# Altium PCB PCM2706 Bus Powered USB DAC 4.PcbDoc
Units mil, origin at the board's own origin, x right, y up, seen from the top; angles counter-clockwise.
Board outline 6000 x 4000 mil, 2 copper layers (Top Layer, Bottom Layer); 29 components, 21 nets, 99 pads, 0 vias.
Unrouted connection lines stored in the file: 2.
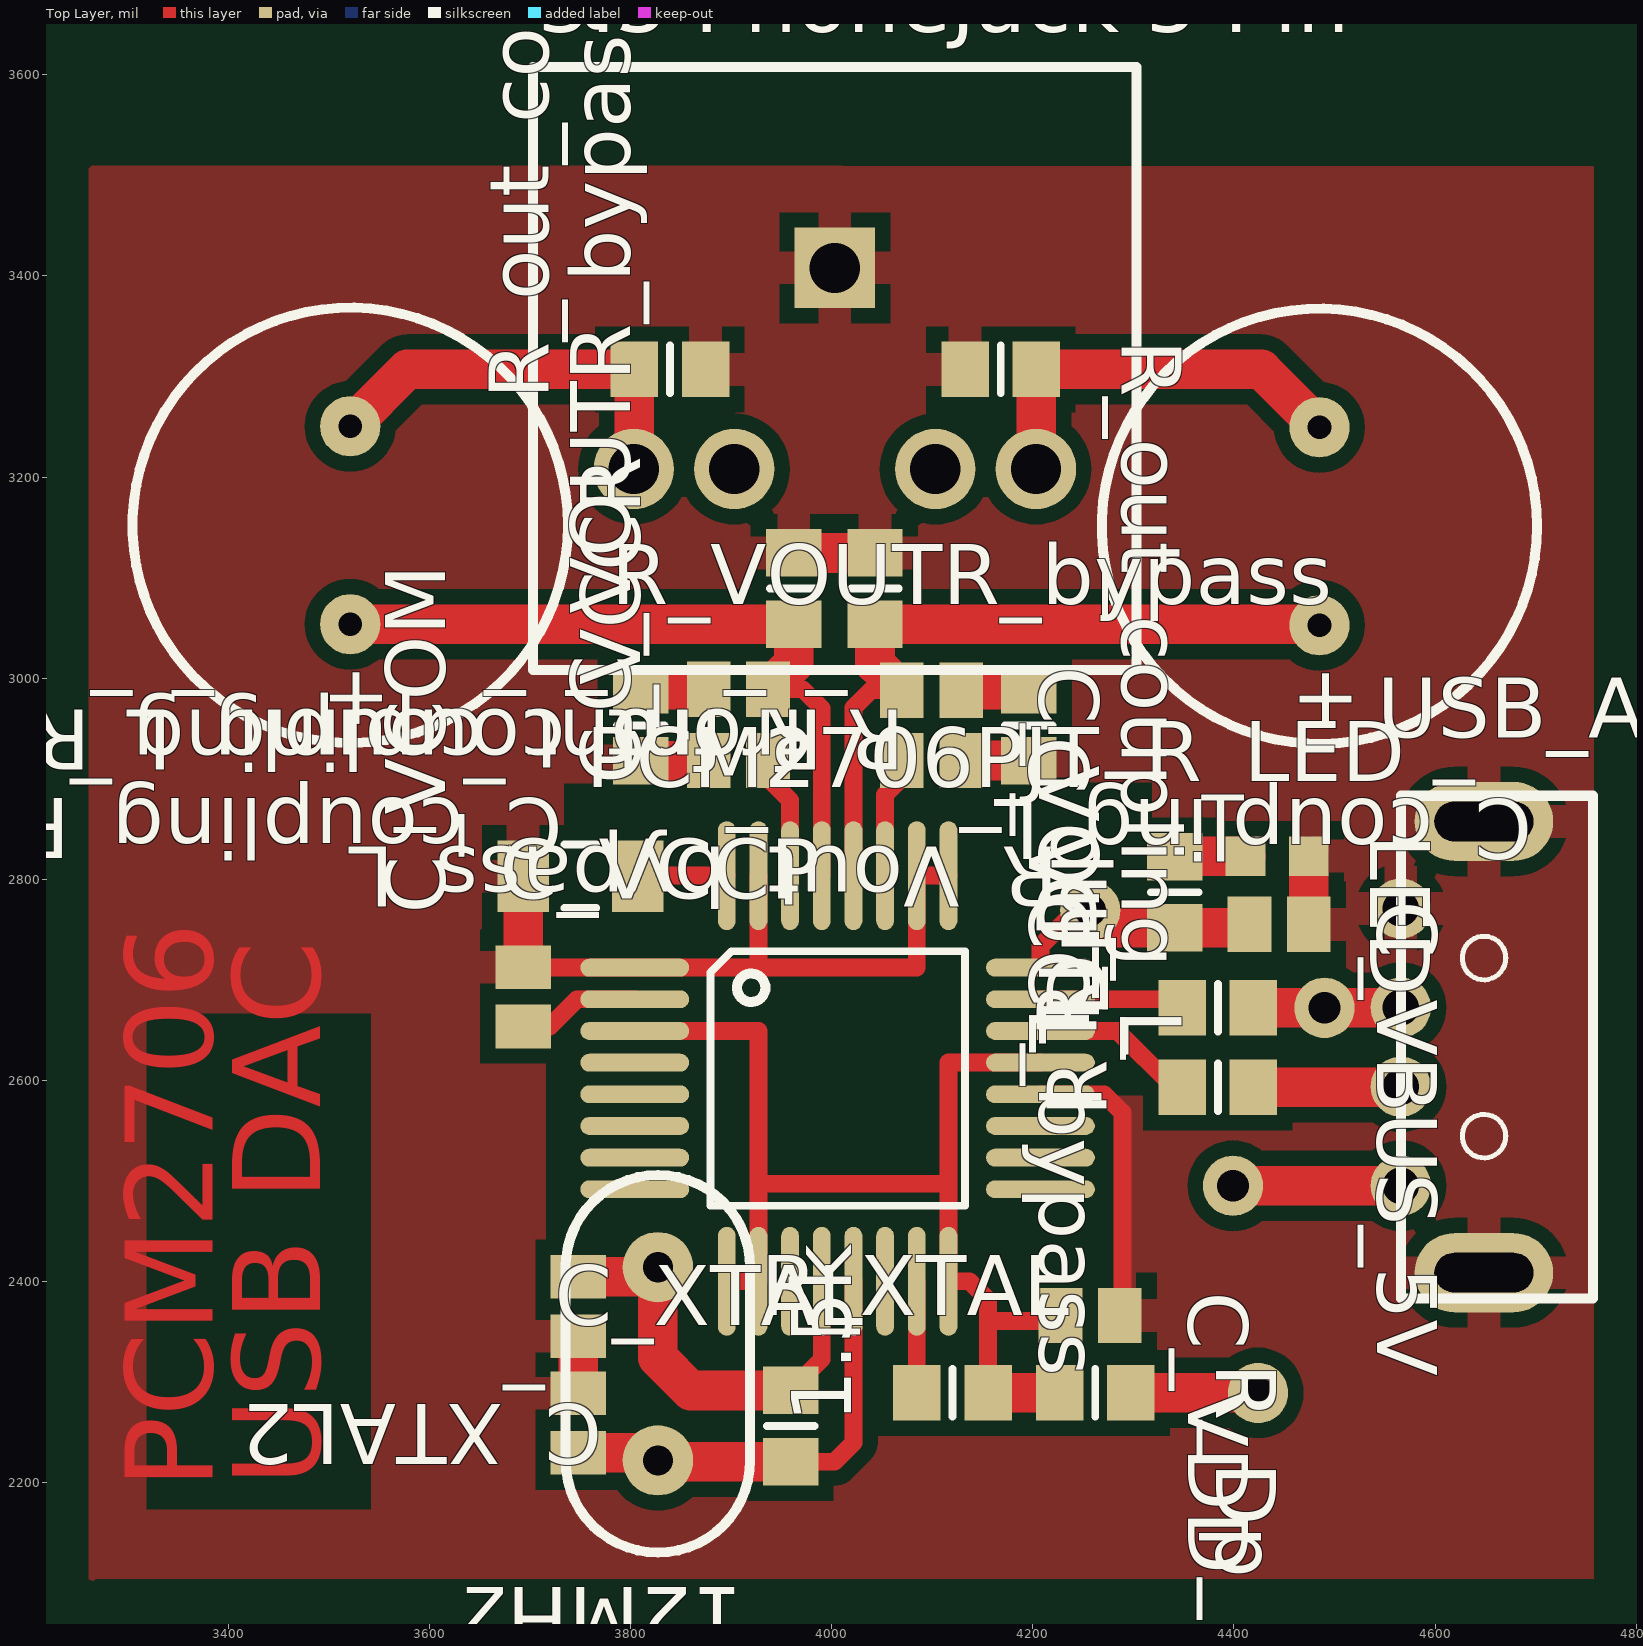
[diagram p0: Top Layer view]
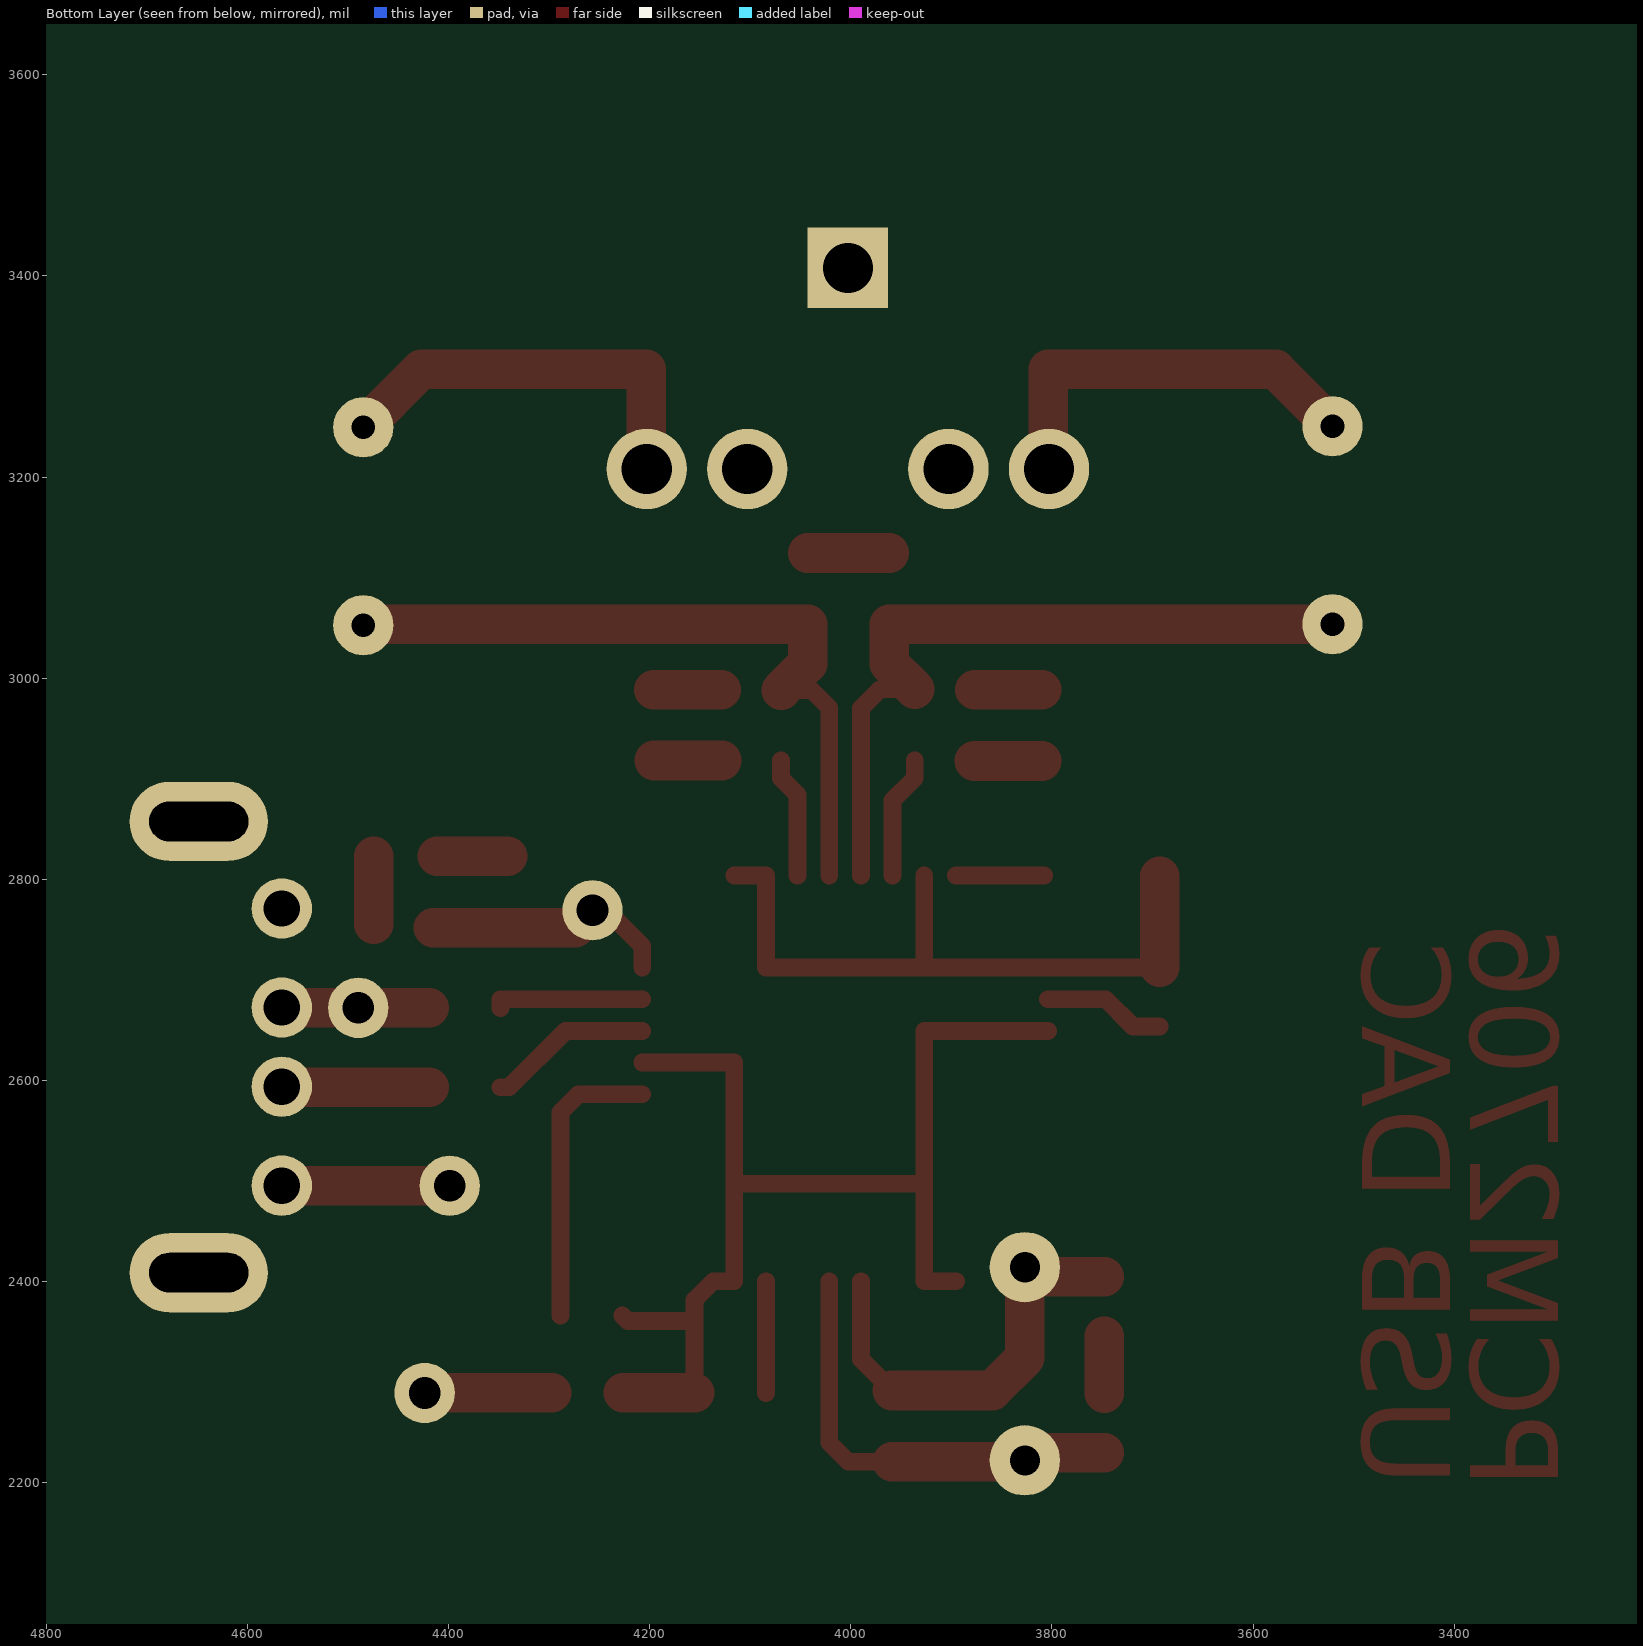
[diagram p1: Bottom Layer view, seen from below]

## Layer stack, top to bottom
Top Layer: signal copper 1.4
Dielectric: dielectric 12.6, FR-4, Dk 4.8
Bottom Layer: signal copper 1.4

## Board outline
1000,1000 7000,1000 7000,5000 1000,5000

## Design rules (kind name [scope] priority, off if disabled: settings)
Clearance [All] p1: gap=15
PolygonConnect [All] p1: connectstyle=Relief reliefconductorwidth=33 reliefentries=4 polygonreliefangle="90 Angle"
RoutingVias [All] p1: holewidth=28 width=50 viastyle="Through Hole" minholewidth=28 minwidth=50 maxholewidth=28 maxwidth=50
SilkscreenOverComponentPads [All] p1: minsilkscreentomaskgap=10
SolderMaskExpansion [All] p1: expansion=4
Width [All] p1: maxlimit=10 minlimit=10 preferedwidth=10
27 further rules are at their usual default settings.

## Components (designator, comment, footprint, x,y, rotation, side; value= is the part's Value field where it differs from the comment)
1.5k "R_DT_pullup" 6-0805_N 4120,2289 r180 top
"3.5 PhoneJack 5 Pin" "3.5 PhoneJack 5 Pin" "3.5 PhoneJack 5 Pin" 4003,3408 r90 top
12MHz "XTAL" "12MHz Crystal OSC through hole" 3827,2318 r270 top
C_coupling_L "Cap Pol1" CAP_270uf_16V_solid_Aluminum 4485,3151 r270 top
C_coupling_R "Cap Pol1" CAP_270uf_16V_solid_Aluminum 3521,3152 r270 top
C_VBUS_5V "" C0805 4445,2755 r0 top
C_VCCL "" C0805 4099,2918 r0 top
C_VCCP "" C0805 3693,2683 r90 top
C_VCCR "" C0805 3907,2918 r180 top
C_VCOM "" CAPC3216N 3750,2803 r180 top
C_VDD "" C0805 4257,2366 r0 top
C_VOUTL_bypass "" C0805 4099,2988 r0 top
C_VOUTR_bypass "" C0805 3907,2989 r180 top
C_XTAL "" C0805 3748,2259 r90 top
C_XTAL2 "" C0805 3748,2375 r270 top
LED "" CAPC1608N 4443,2823 r0 top
PCM2706PJT "PCM2706PJT" S-PQFP-N32-2mm-out 3804,2712 r0 top
R_Dm "22" 6-0805_N 4384,2593 r180 top
R_Dp "22" 6-0805_N 4384,2672 r180 top
R_Dp_pullup "1.5k" 6-0805_N 4262,2289 r0 top
R_front_coupling_L "3.3k" 6-0805_N 4043,3089 r270 top
R_front_coupling_R "3.3k" 6-0805_N 3962,3089 r270 top
R_LED "330" 6-0805_N 4341,2787 r90 top
R_out_coupling_L "3.3k" 6-0805_N 4168,3307 r0 top
R_out_coupling_R "3.3k" 6-0805_N 3839,3307 r180 top
R_Vout_bypass_L "16" 6-0805_N 4196,2953 r270 top
R_VOUTR_bypass "16" 6-0805_N 3810,2953 r90 top
R_XTAL "1M" 6-0805_N 3959,2256 r90 top
USB_A_male_thruhole "USB_A_male_thruhole" USB_A_male_thruhole 4566,2633 r90 top

## Footprints (in the part's own frame and the unit in brackets; to place one, negate y for a bottom-side part, rotate by r counter-clockwise, add the part's x,y. Pads: shape width x height; smd on the part's side, far side on the other; paste and mask are expansions set on the pad)
"3.5 PhoneJack 5 Pin" [mil] "3.5 PhoneJack 5 Pin"
  rect 80x80 hole 50: COM(0,0)
  round 80 hole 50: L_NC(-200,-100) L_NO(-200,-200) R_NC(-200,100) R_NO(-200,200)
  silkscreen extent -400,-300 200,300
6-0805_N [mm] "Chip Resistor, Body 2.0x1.2mm, IPC Medium Density"
  rect 1.2x1.4 smd: 1(-0.9,0) 2(0.9,0)
  silkscreen extent 0,-0.6 0,0.6, body extent -1.07,-0.7 1.07,0.7, height 0.7
"12MHz Crystal OSC through hole" [mil]
  round 70 hole 30: 1(-96.06,0) 2(96.06,0)
  silkscreen extent -188,-92 188,92
C0805 [mm] "Chip Capacitor, Body 2.0x1.3mm, IPC High Density"
  rect 1.1x1.4 smd: 1(-0.75,0) 2(0.75,0)
  body extent -1.1,-0.72 1.1,0.72, height 1.4
CAP_270uf_16V_solid_Aluminum [mil]
  round 60 hole 23.62: 1(98.43,0) 2(-98.43,0)
  silkscreen extent -216,-216 216,217
CAPC1608N [mm] "Chip Capacitor, Body 1.6x0.8mm, IPC Medium Density"
  rect 1x1 smd: 1(-0.8,0) 2(0.8,0)
  body extent -0.87,-0.48 0.87,0.48, height 0.85
CAPC3216N [mm] "Chip Capacitor, Body 3.2x1.6mm, IPC Medium Density"
  rect 1.3x1.8 smd: 1(-1.45,0) 2(1.45,0)
  silkscreen extent -0.4,-0.8 0.4,0.8, body extent -1.7,-0.9 1.7,0.9, height 1.35
S-PQFP-N32-2mm-out [mm]
  oval 2.75x0.45 smd: 1(0,0) 2(0,-0.8) 3(0,-1.6) 4(0,-2.4) 5(0,-3.2) 6(0,-4) 7(0,-4.8) 8(0,-5.6) 17(10.25,-5.6) 18(10.25,-4.8) 19(10.25,-4) 20(10.25,-3.2) 21(10.25,-2.4) 22(10.25,-1.6) 23(10.25,-0.8) 24(10.25,0)
  oval 0.45x2.75 smd: 9(2.325,-7.925) 10(3.125,-7.925) 11(3.925,-7.925) 12(4.725,-7.925) 13(5.525,-7.925) 14(6.325,-7.925) 15(7.125,-7.925) 16(7.925,-7.925) 25(7.925,2.325) 26(7.125,2.325) 27(6.325,2.325) 28(5.525,2.325) 29(4.725,2.325) 30(3.925,2.325) 31(3.125,2.325) 32(2.325,2.325)
  silkscreen extent 1.91,-6.02 8.34,0.42
USB_A_male_thruhole [mm]
  oval 2x3.5 hole 1 slot 2.5 at 90 deg: com(-5.7,-2.1) com(5.7,-2.1)
  round 1.524 hole 0.92: D+(1,0) D-(-1,0) Gnd(3.5,0) Vbus(-3.5,0)
  silkscreen extent -6.35,-4.85 6.35,0

## Part data
1.5k R_Dm R_Dp R_Dp_pullup R_front_coupling_L R_front_coupling_R R_LED R_out_coupling_L R_out_coupling_R R_Vout_bypass_L R_VOUTR_bypass R_XTAL: library part "Res Thermal", "Thermistor"
12MHz: "Crystal Oscillator"
C_coupling_L C_coupling_R: "Polarized Capacitor (Radial)"
C_VBUS_5V C_VCCL C_VCCP C_VCCR C_VCOM C_VDD C_VOUTL_bypass C_VOUTR_bypass C_XTAL C_XTAL2: library part "Cap Pol3", "Polarized Capacitor (Surface Mount)"
LED: library part LED2, "Typical RED, GREEN, YELLOW, AMBER GaAs LED"

## Free pads (board coordinates)
  round 60 hole 31.5: Jump_D+_1(4490,2672) Jump_D+_2(4424,2289) Jump_Vbus_1(4399,2495) Jump_Vbus_2(4257,2769)

## Nets (pads, with @x,y where several pads share a name; then routed paths per layer and width w, separated by ;. In a path a pad name is that pad's centre, name@x,y a point inside that pad or via, vN(x,y) a via of type N, cw(c..) or ccw(c..) an arc to the next point about the centre after c; other vN are vias at no path point)
GND: "3.5 PhoneJack 5 Pin.COM" C_VBUS_5V.2 C_VCCL.2 C_VCCP.2 C_VCCR.2 C_VCOM.2 C_VDD.2 C_XTAL2.2 C_XTAL.2 LED.2 PCM2706PJT.1 PCM2706PJT.20 PCM2706PJT.25 PCM2706PJT.26 PCM2706PJT.31 R_front_coupling_L.1 R_front_coupling_R.1 R_out_coupling_L.1 R_out_coupling_R.1 R_Vout_bypass_L.2 R_VOUTR_bypass.1 USB_A_male_thruhole.com USB_A_male_thruhole.Gnd | length 1326.8
  Top Layer w17.72: C_VCCP.2@3693.53,2712 PCM2706PJT.1 3927.03,2712 ; PCM2706PJT.31 3927.03,2712 ; PCM2706PJT.25 PCM2706PJT.26 4084.51,2712 3927.03,2712 ; PCM2706PJT.20 4270.98,2586.02 4289,2568 C_VDD.2@4289,2366
  Top Layer w39.37: C_VCCP.2 C_VCOM.2@3693,2802.91 ; C_XTAL.2 C_XTAL2.2 ; R_VOUTR_bypass.1 C_VCCR.2@3877.04,2917.57 ; R_front_coupling_R.1 R_front_coupling_L.1 ; C_VCCL.2 R_Vout_bypass_L.2@4195.57,2918 ; C_VBUS_5V.2 LED.2
Net1.5k_2: 1.5k.2 PCM2706PJT.15 | length 110.9
  Top Layer w17.72: 1.5k.2@4084.51,2289.05 PCM2706PJT.15
"Net3.5 PhoneJack 5 Pin_L_NO": "3.5 PhoneJack 5 Pin.L_NO" C_coupling_L.2 R_out_coupling_L.2 | length 404
  Top Layer w39.37: 4203.43,3208.43 R_out_coupling_L.2 4427.43,3307 C_coupling_L.2
"Net3.5 PhoneJack 5 Pin_R_NO": "3.5 PhoneJack 5 Pin.R_NO" C_coupling_R.2 R_out_coupling_R.2 | length 404.4
  Top Layer w39.37: C_coupling_R.2 3577.57,3307 R_out_coupling_R.2 3803.57,3208.57
Net12MHz_1: 12MHz.1 C_XTAL2.1 PCM2706PJT.12 R_XTAL.2 | length 453.4
  Top Layer w10: C_XTAL2.1 C_XTAL2.1@3757.54,2414.06
  Top Layer w17.72: R_XTAL.2 3990.02,2322.46 PCM2706PJT.12
  Top Layer w39.37: C_XTAL2.1 3817.46,2404.53 12MHz.1 3827,2324 3859.57,2291.43 R_XTAL.2
Net12MHz_2: 12MHz.2 C_XTAL.1 PCM2706PJT.13 R_XTAL.1 | length 445.5
  Top Layer w10: 12MHz.2@3819.46,2229.47 12MHz.2
  Top Layer w17.72: R_XTAL.1 4002.57,2220.57 4021.52,2239.52 PCM2706PJT.13
  Top Layer w39.37: C_XTAL.1 12MHz.2@3819.46,2229.47 ; 12MHz.2 3828.37,2220.57 R_XTAL.1
NetC_coupling_L_1: C_coupling_L.1 C_VOUTL_bypass.1 PCM2706PJT.28 R_front_coupling_L.2 | length 741.1
  Top Layer w10: C_coupling_L.1@4484.01,3053.57 C_coupling_L.1
  Top Layer w17.72: PCM2706PJT.28 4021.52,2970.52 4039,2988 C_VOUTL_bypass.1
  Top Layer w39.37: C_VOUTL_bypass.1 4043,3014.47 R_front_coupling_L.2 C_coupling_L.1@4484.01,3053.57
NetC_coupling_R_1: C_coupling_R.1 C_VOUTR_bypass.1 PCM2706PJT.29 R_front_coupling_R.2 | length 743.9
  Top Layer w17.72: C_VOUTR_bypass.1 3971,2989 3990.02,2969.98 PCM2706PJT.29
  Top Layer w39.37: C_coupling_R.1 R_front_coupling_R.2 3962,3014.47 C_VOUTR_bypass.1
NetC_VBUS_5V_1: C_VBUS_5V.1 pad.Jump_Vbus_1 pad.Jump_Vbus_2 PCM2706PJT.24 R_LED.1 USB_A_male_thruhole.Vbus | length 418.2
  Top Layer w17.72: PCM2706PJT.24 4207.54,2733.54 4243,2769 pad.Jump_Vbus_2
  Top Layer w39.37: pad.Jump_Vbus_2 4274.43,2751.57 R_LED.1 C_VBUS_5V.1@4415.47,2751.57 ; pad.Jump_Vbus_1@4399.2,2495.2 USB_A_male_thruhole.Vbus
NetC_VCCL_1: C_VCCL.1 PCM2706PJT.27 | length 121.3
  Top Layer w17.72: PCM2706PJT.27 4053.02,2884.02 4069.47,2900.47 C_VCCL.1
NetC_VCCP_1: C_VCCP.1 PCM2706PJT.2 | length 122.2
  Top Layer w17.72: C_VCCP.1 3719.47,2653.47 3746.5,2680.5 PCM2706PJT.2
NetC_VCCR_1: C_VCCR.1 PCM2706PJT.30 | length 123.6
  Top Layer w17.72: C_VCCR.1 3936.53,2900.47 3958.53,2878.47 PCM2706PJT.30
NetC_VCOM_1: C_VCOM.1 PCM2706PJT.32 | length 87.9
  Top Layer w17.72: C_VCOM.1@3807.62,2803.54 PCM2706PJT.32
NetC_VOUTL_bypass_2: C_VOUTL_bypass.2 R_Vout_bypass_L.1 | length 67
  Top Layer w39.37: C_VOUTL_bypass.2@4128.96,2988.43 R_Vout_bypass_L.1
NetC_VOUTR_bypass_2: C_VOUTR_bypass.2 R_VOUTR_bypass.2 | length 66.9
  Top Layer w39.37: R_VOUTR_bypass.2 C_VOUTR_bypass.2@3876.91,2988.43
NetLED_1: LED.1 R_LED.2 | length 69.9
  Top Layer w39.37: R_LED.2@4341.57,2823 LED.1
NetPCM2706PJT_22: PCM2706PJT.22 R_Dm.2 | length 164.2
  Top Layer w17.72: PCM2706PJT.22 4283.99,2649.01 4340,2593 R_Dm.2
NetPCM2706PJT_23: PCM2706PJT.23 R_Dp.2 | length 149.5
  Top Layer w17.72: PCM2706PJT.23 4348.57,2680.5 R_Dp.2
NetR_Dm_1: R_Dm.1 USB_A_male_thruhole.D- | length 146.8
  Top Layer w39.37: R_Dm.1 4565.37,2593 USB_A_male_thruhole.D-
NetR_Dp_1: pad.Jump_D+_1 pad.Jump_D+_2 R_Dp.1 R_Dp_pullup.2 USB_A_male_thruhole.D+ | length 272.8
  Top Layer w39.37: R_Dp_pullup.2 pad.Jump_D+_2 ; R_Dp.1 USB_A_male_thruhole.D+@4565.63,2672
VCC: 1.5k.1 C_VDD.1 PCM2706PJT.3 PCM2706PJT.9 PCM2706PJT.10 PCM2706PJT.16 PCM2706PJT.21 R_Dp_pullup.1 | length 1186.6
  Top Layer w17.72: PCM2706PJT.3 3927.03,2649.01 3927.03,2497 ; PCM2706PJT.9 PCM2706PJT.10 3927.03,2497 ; 1.5k.1 4155.43,2360.57 ; PCM2706PJT.21 4116.01,2617.51 4116.01,2497 ; C_VDD.1 4222.04,2360.57 4155.43,2360.57 ; 3927.03,2497 4116.01,2497 ; 4116.01,2497 PCM2706PJT.16 4137.01,2399.99 4155.43,2381.57 4155.43,2360.57
  Top Layer w39.37: 1.5k.1 R_Dp_pullup.1
pads on no net: "3.5 PhoneJack 5 Pin.L_NC" "3.5 PhoneJack 5 Pin.R_NC" PCM2706PJT.4 PCM2706PJT.5 PCM2706PJT.6 PCM2706PJT.7 PCM2706PJT.8 PCM2706PJT.11 PCM2706PJT.14 PCM2706PJT.17 PCM2706PJT.18 PCM2706PJT.19

## Polygon pours and split planes (outlines as drawn)
GND on Top Layer "pour" (solid, pour order 4): 3261,3510 3261,2097 3267.87,2104.05 4758,2104.05 4758,3507.98 4757.02,3508.99

## Other copper
Top Layer:
  pour cut-out: 3319.51,2663.91 3319.51,2173.15 3538.76,2173.15 3541.5,2173.2 3541.46,2175.85 3541.46,2664.13
  pour cut-out: 4318,2585 4283,2585 4283,2896 4318,2896
  pour cut-out: 3734,2895 3734,2319 4283,2320 4283,2896
  pour cut-out: 3716,2853.43 3847,2854 3847.68,2853.43 3847,2435 3716,2435
  text "USB DAC" at 3520,2196 h150 r90
  text "PCM2706" at 3413,2193 h150 r90

## Text inside footprints (layer, text, board x,y; h text height)
C_coupling_L: Top Overlay "+" at 4465.31,3013.2 h60 r270
C_coupling_R: Top Overlay "+" at 3501.32,3014.2 h60 r270